# Altium PCB CONNECTORS.PcbDoc
Units mm, origin at the board's own origin, x right, y up, seen from the top; angles counter-clockwise.
Board outline 48.77 x 23.12 mm, 2 copper layers (Top Layer, Bottom Layer); 14 components, 6 nets, 47 pads, 1 vias.
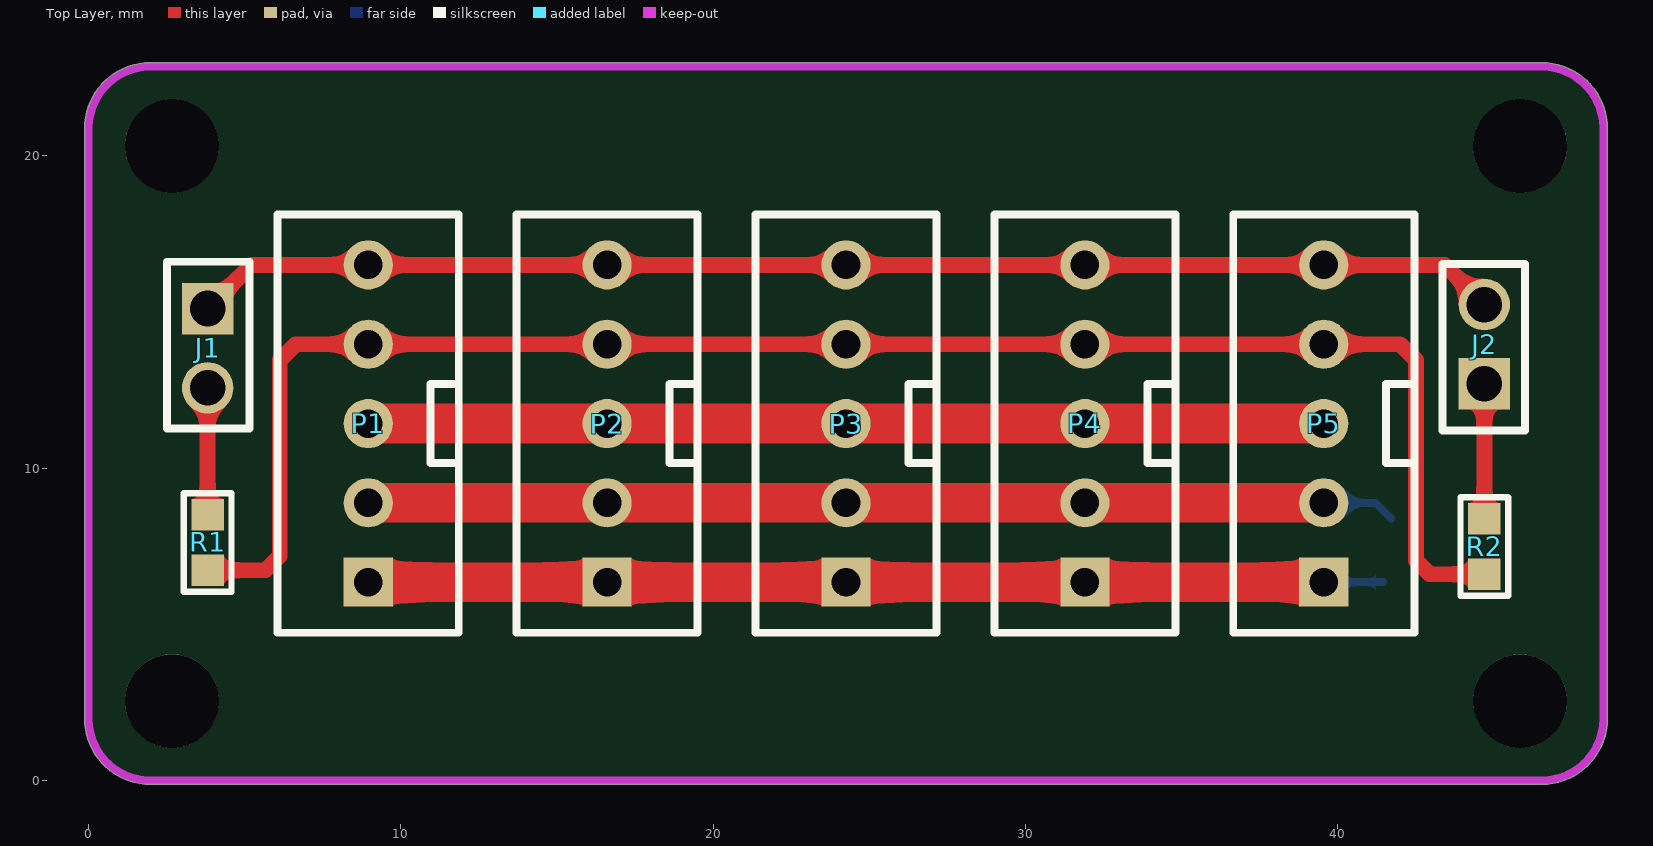
[diagram p0: Top Layer view]
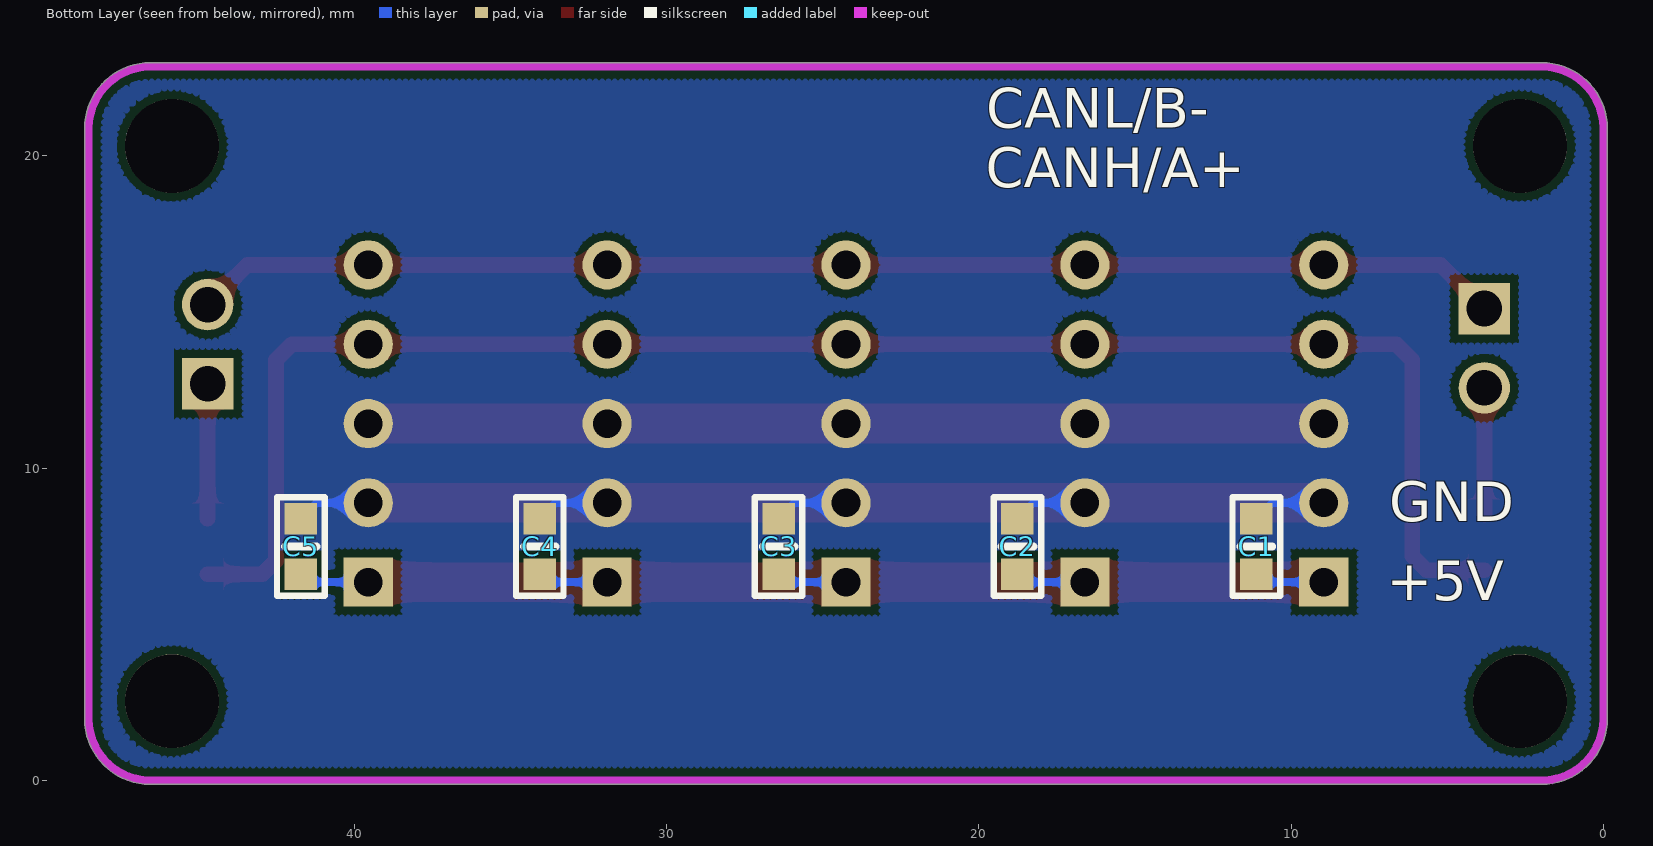
[diagram p1: Bottom Layer view, seen from below]
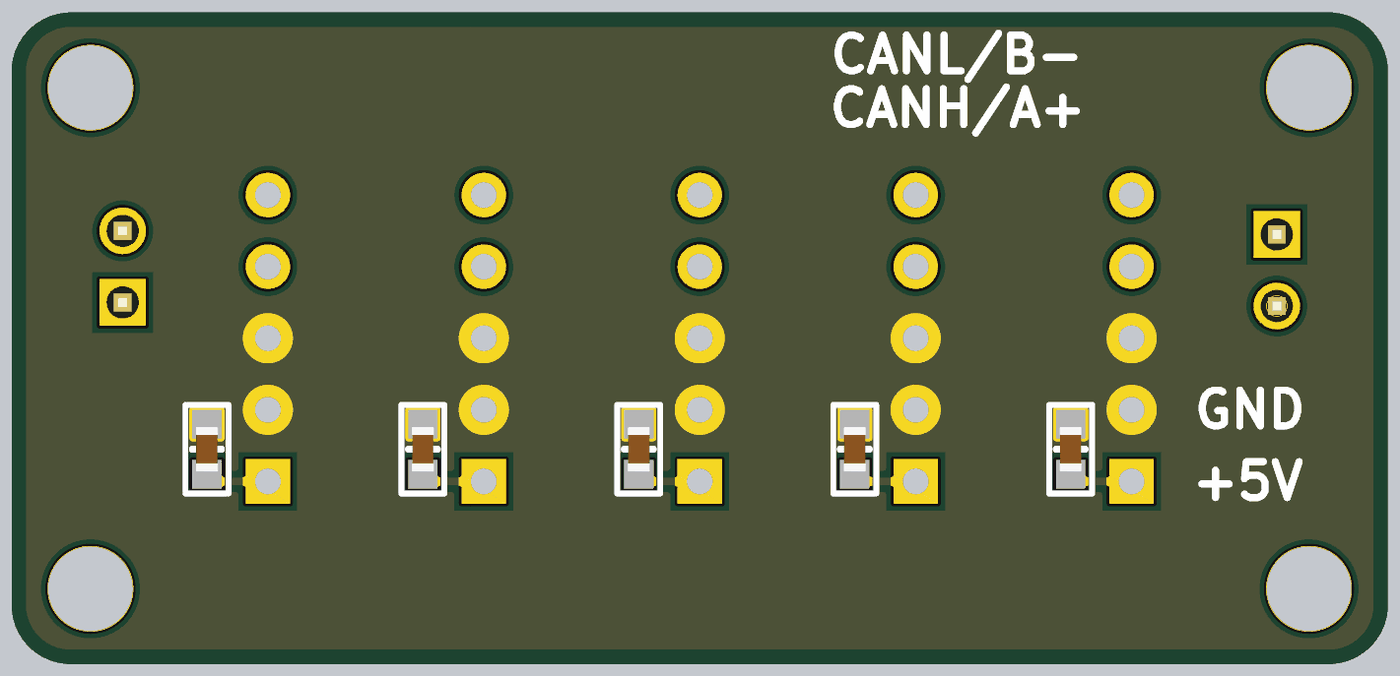
[diagram p2: 3D render of the assembled board from below, using the file's embedded part models]

## Layer stack, top to bottom
Top Solder: solder mask 0.0102, Solder Resist, Dk 3.5
Top Layer: signal copper 0.0356
Dielectric 1: dielectric 0.32, FR-4, Dk 4.8
Bottom Layer: signal copper 0.0356
Bottom Solder: solder mask 0.0102, Solder Resist, Dk 3.5

## Board outline
-0.128,1.968 cw(c-0.001,1.968) -0.124,2.002 cw(c0,2.032) -0.127,2.032 -0.127,20.875 cw(c-0.001,20.892) -0.128,20.892 cw(c1.968,20.892) 1.968,22.988 cw(c1.968,22.861) 1.985,22.987 46.545,22.987 cw(c46.545,20.89) 48.642,20.89 cw(c48.515,20.89) 48.641,20.874 48.641,1.968 cw(c48.514,1.968) 48.641,1.968 ccw(c46.544,1.968) 48.641,1.968 cw(c46.544,1.968) 46.544,-0.128 cw(c46.544,-0.001) 46.528,-0.127 1.985,-0.127 cw(c1.968,-0.001) 1.968,-0.128 cw(c1.968,1.968)

## Design rules (kind name [scope] priority, off if disabled: settings)
Clearance "Schematic Clearance Constraint" [InComponent('U6')] p1 off: gap=0.203
Clearance [All] p2: gap=0.254
ComponentClearance [All] p1: gap=0 collisioncheckmode=3 verticalgap=0 showdistances=FALSE
HoleSize [All] p1: absolutevalues=TRUE maxlimit=12.7 minlimit=0.025 maxpercent=80.000 minpercent=20.000
HoleToHoleClearance [All] p1: gap=0 allowstackedmicrovias=TRUE
MinimumSolderMaskSliver [All] p1: minsoldermaskwidth=0
PlaneConnect [All] p1: planeconnectstyle=Direct reliefexpansion=0.508 reliefentries=4 reliefconductorwidth=0.254 reliefairgap=0.254
PolygonConnect PolygonConnect_1 [IsVia vs InNet('GND')] p1 off: connectstyle=Direct reliefconductorwidth=0.254 reliefentries=4 polygonreliefangle="90 Angle" airgapwidth=0.254
PolygonConnect PolygonConnect_2 [All] p2: connectstyle=Direct reliefconductorwidth=0.254 reliefentries=4 polygonreliefangle="90 Angle" airgapwidth=0.254
RoutingVias [All] p1: holewidth=0.711 width=1.27 viastyle="Through Hole" minholewidth=0.711 minwidth=1.27 maxholewidth=0.711 maxwidth=1.27
SilkToSilkClearance [All] p1: silktosilkclearance=0
SilkToSolderMaskClearance [IsPad] p1: minsilkscreentomaskgap=0 clearancetoexposedcopper=TRUE
SolderMaskExpansion [All] p1: expansion=0.102
Width [All] p1: maxlimit=7.62 minlimit=0.203 preferedwidth=0.203
23 further rules are at their usual default settings.

## Components (designator, comment, footprint, x,y, rotation, side; value= is the part's Value field where it differs from the comment)
C1 "0.1uF/50V" 0603C 11.113,7.493 r270 bottom
C2 "0.1uF/50V" 0603C 18.764,7.493 r270 bottom
C3 "0.1uF/50V" 0603C 26.416,7.493 r270 bottom
C4 "0.1uF/50V" 0603C 34.068,7.493 r270 bottom
C5 "0.1uF/50V" 0603C 41.72,7.493 r270 bottom
J1 "Header 2" HDR1*2 3.81,13.843 r270 top
J2 "Header 2" HDR1*2 44.704,13.97 r90 top
P1 "Header 5" XH2.54-5P 8.954,11.43 r90 top
P2 "Header 5" XH2.54-5P 16.605,11.43 r90 top
P3 "Header 5" XH2.54-5P 24.257,11.43 r90 top
P4 "Header 5" XH2.54-5P 31.909,11.43 r90 top
P5 "Header 5" XH2.54-5P 39.561,11.43 r90 top
R1 "120R" 0603R 3.937,7.62 r90 top
R2 "120R" 0603R 44.831,7.493 r90 top

## Footprints (in the part's own frame and the unit in brackets; to place one, negate y for a bottom-side part, rotate by r counter-clockwise, add the part's x,y. Pads: shape width x height; smd on the part's side, far side on the other; paste and mask are expansions set on the pad)
0603C [mil]
  rect 40x41 smd: 1(-35,0) 2(35,0)
  silkscreen extent -62,-30 62,30, body extent -31,-16 31,16, height 24
0603R [mil]
  rect 40x41 smd: 1(35,5) 2(-35,5)
  silkscreen extent -62,-25 62,35, body extent -31,-11 31,21, height 18
HDR1*2 [mil]
  rect 65x65 hole 45: 1(-50,0)
  round 65 hole 45: 2(50,0)
  silkscreen extent -109,-51 101,53, body extent -104,-49 96,49, height 323
XH2.54-5P [mil] "Connector; Header; 5 Position"
  rect 62x62 hole 36: 1(-200,0)
  round 62 hole 36: 2(-100,0) 3(0,0) 4(100,0) 5(200,0)
  silkscreen extent -264,-114 264,114

## Part data
C1 C2 C3 C4 C5: library part CAP, "Capacitor"
J1 J2: "Header, 2-Pin"
P1 P2 P3 P4 P5: "Header, 5-Pin"
R1 R2: library part RES2A

## Free pads (board coordinates)
  round 3 hole 3: 0(2.667,2.54) 0(2.667,20.32) 0(45.847,2.54) 0(45.847,20.32)

## Via types
v1: diameter 1.27, hole 0.711, Top Layer to Bottom Layer, 1 vias

## Nets (pads, with @x,y where several pads share a name; then routed paths per layer and width w, separated by ;. In a path a pad name is that pad's centre, name@x,y a point inside that pad or via, vN(x,y) a via of type N, cw(c..) or ccw(c..) an arc to the next point about the centre after c; other vN are vias at no path point)
CANH/A+: P1.4 P2.4 P3.4 P4.4 P5.4 R1.2 R2.2 | length 54.4
  Top Layer w0.508: R1.2 5.664,6.731 6.121,7.188 6.121,13.462 6.629,13.97 P1.4 P2.4 P3.4 P4.4 P5.4 42.012,13.97 42.52,13.462 42.52,7.036 42.951,6.604 R2.2
CANL/B-: J1.1 J2.2 P1.5 P2.5 P3.5 P4.5 P5.5 | length 42
  Top Layer w0.508: J1.1 5.207,16.51 P1.5 P2.5 P3.5 P4.5 P5.5 43.434,16.51 J2.2
GND: C1.1 C2.1 C3.1 C4.1 C5.1 P1.2 P1.3 P2.2 P2.3 P3.2 P3.3 P4.2 P4.3 P5.2 P5.3 | length 73.1
  Top Layer w1.27: P1.2 P2.2 P3.2 P4.2 P5.2 ; P1.3 P2.3 P3.3 P4.3 P5.3
  Bottom Layer w0.254: P1.2 10.605,8.89 C1.1 ; P2.2 18.256,8.89 C2.1 ; P3.2 25.908,8.89 C3.1 ; P4.2 33.56,8.89 C4.1 ; P5.2 41.212,8.89 C5.1
NetJ1_2: J1.2 R1.1 | length 4.1
  Top Layer w0.508: R1.1 v1(3.81,12.573)
NetJ2_1: J2.1 R2.1 | length 4.3
  Top Layer w0.508: R2.1 J2.1
VCC_+5V: C1.2 C2.2 C3.2 C4.2 C5.2 P1.1 P2.1 P3.1 P4.1 P5.1 | length 40.9
  Top Layer w1.27: P1.1 P2.1 P3.1 P4.1 P5.1
  Bottom Layer w0.254: P1.1 C1.2@10.859,6.35 ; P2.1 18.51,6.35 C2.2 ; P3.1 26.162,6.35 C3.2 ; P4.1 C4.2@33.814,6.35 ; P5.1 C5.2@41.466,6.35

## Polygon pours and split planes (outlines as drawn)
GND on Bottom Layer "Bottom Layer-No Net" (hatched 90Degree grid 0.203 track 0.203, remove dead copper, pour order 0): 0.076,22.911 0.152,22.835 48.387,22.835 48.387,0.051 48.463,-0.025 48.311,0.127 -0.051,0.127

## Keep-outs
Keep-Out Layer:
  lines w0.254: -0.001,1.968 ccw(c1.968,1.968) 1.968,-0.001 ; -0.001,20.892 cw(c1.968,20.892) 1.968,22.861 ; 0,2.032 0,20.892 ; 1.968,0 46.544,0 ; 1.968,22.86 46.545,22.86 cw(c46.545,20.89) 48.515,20.89 ; 46.544,-0.001 ccw(c46.544,1.968) 48.514,1.968 48.514,20.89

## Silkscreen, mask and mechanical layers (free items; w line width, h text height)
Bottom Overlay:
  text "CANL/B-" at 19.761,20.904 h1.27
  text "CANH/A+" at 19.787,18.999 h1.27
  text "GND" at 6.858,8.306 h1.27
  text "+5V" at 6.934,5.766 h1.27